# Altium PCB SOLAR CHARGER.PcbDoc
Units mm, origin at the board's own origin, x right, y up, seen from the top; angles counter-clockwise.
Board outline 37 x 32.33 mm, 2 copper layers (Top Layer, Bottom Layer); 38 components, 24 nets, 107 pads, 107 vias.
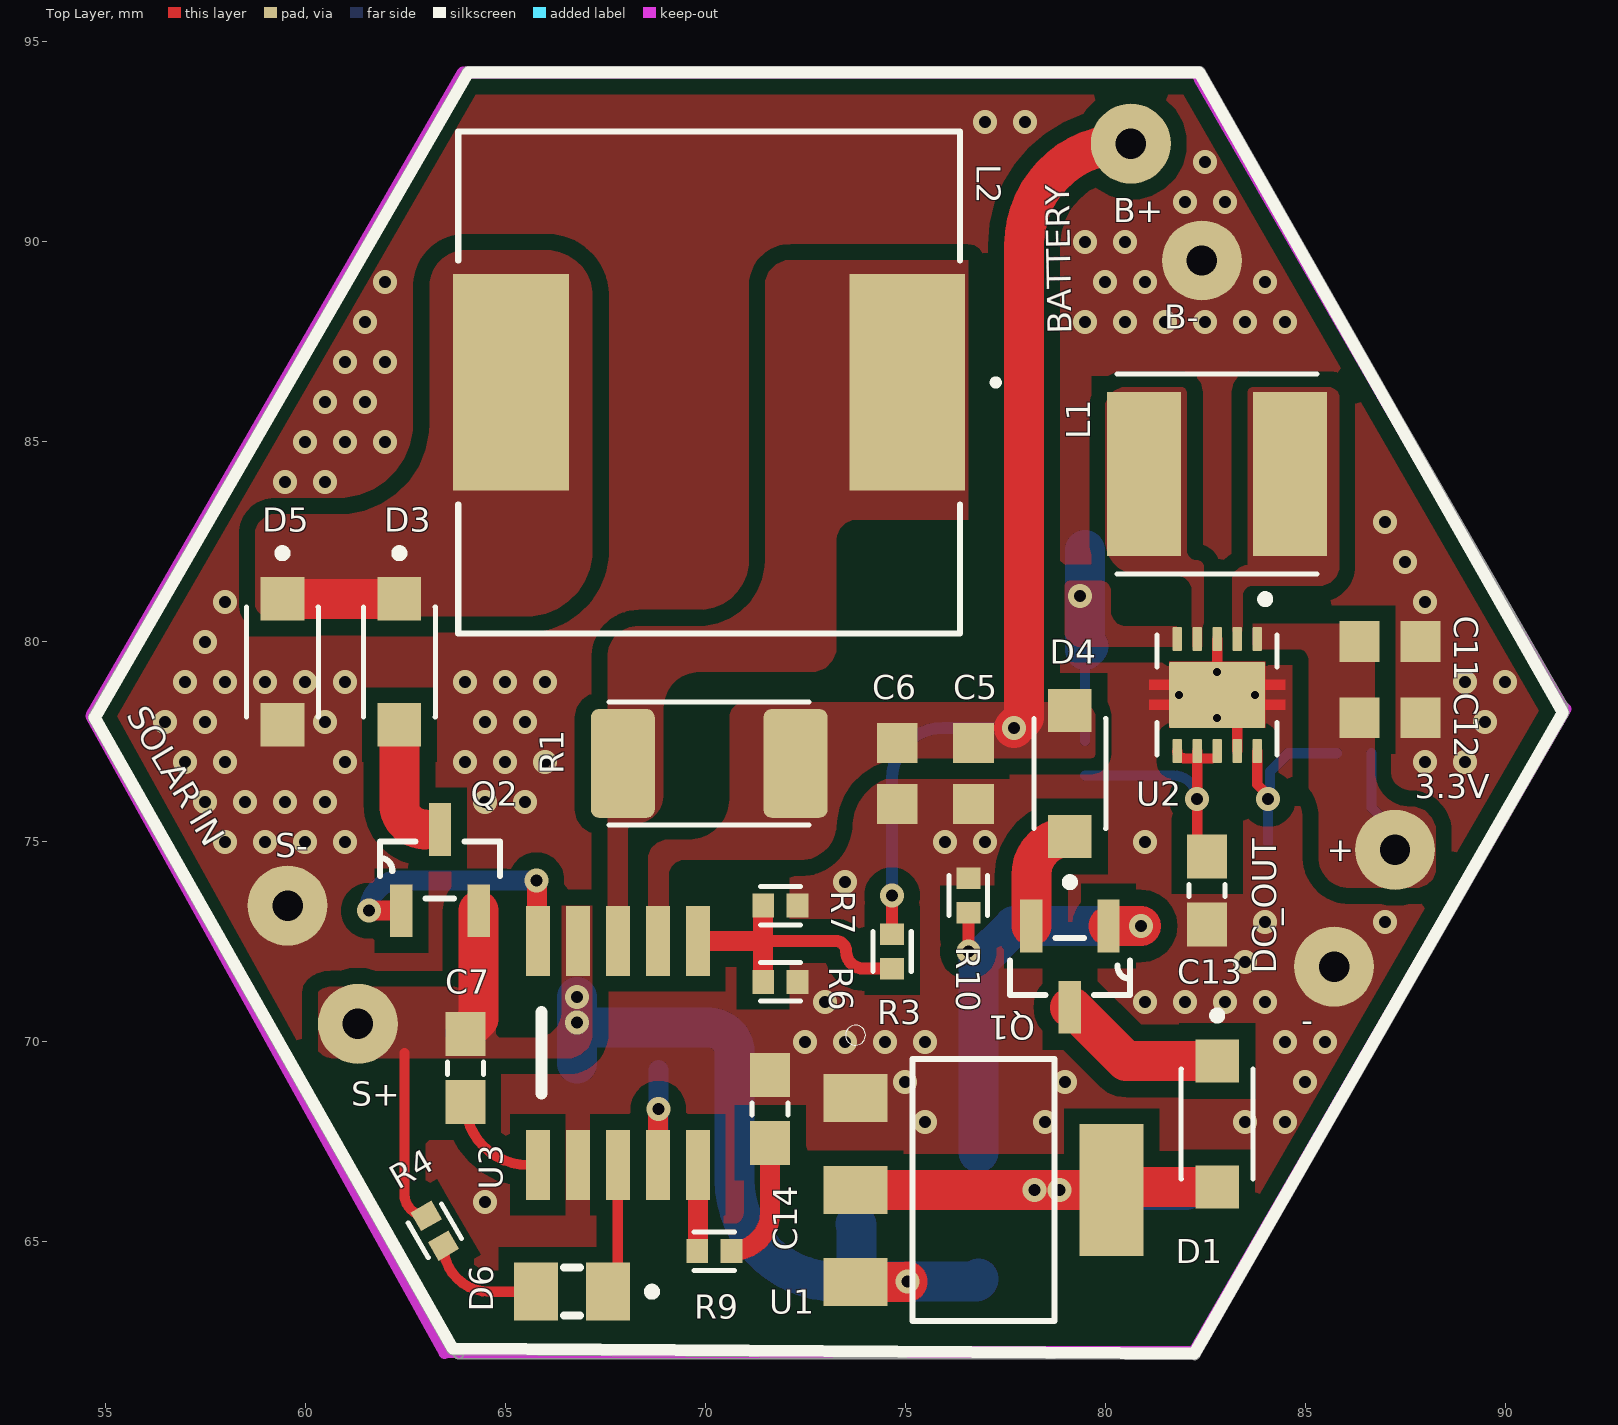
[diagram p0: Top Layer view]
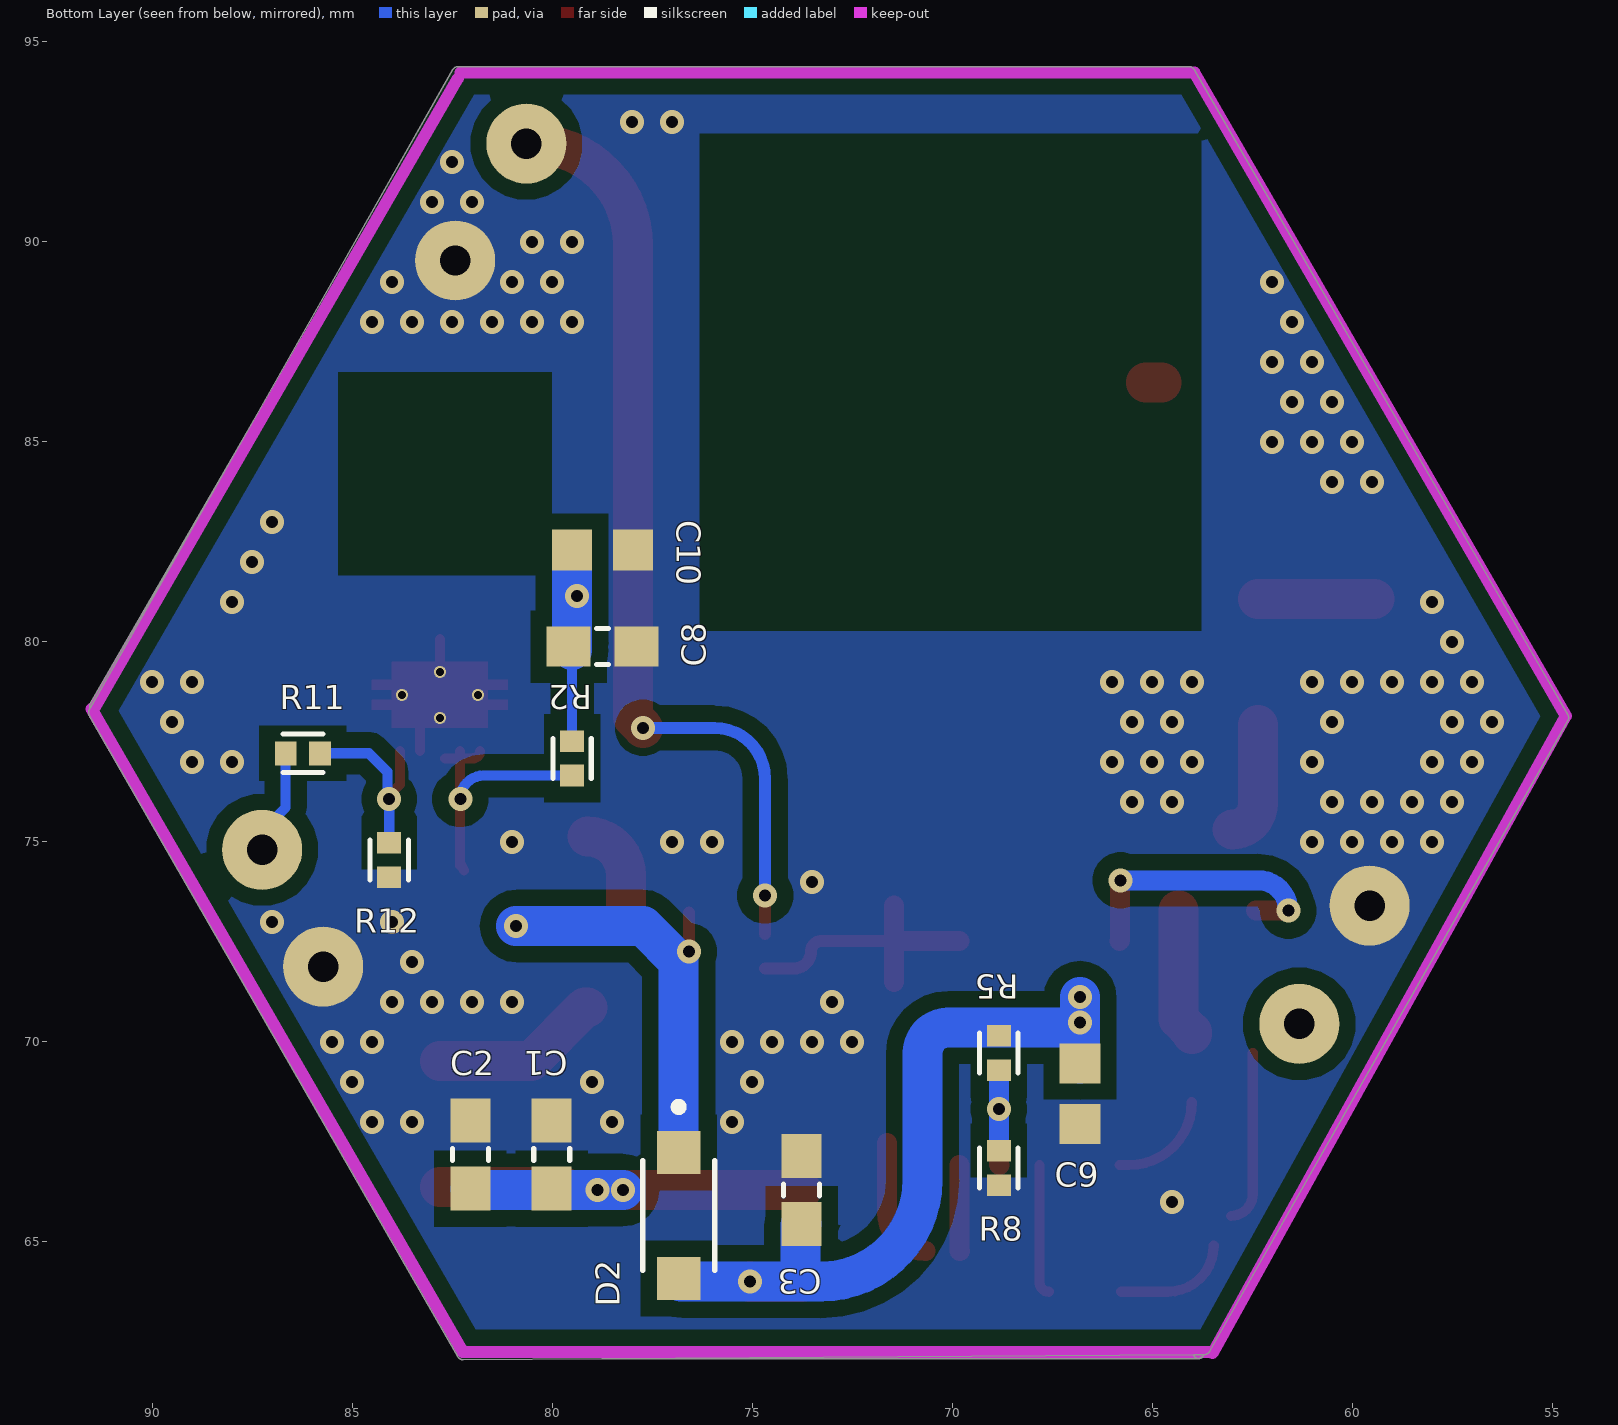
[diagram p1: Bottom Layer view, seen from below]
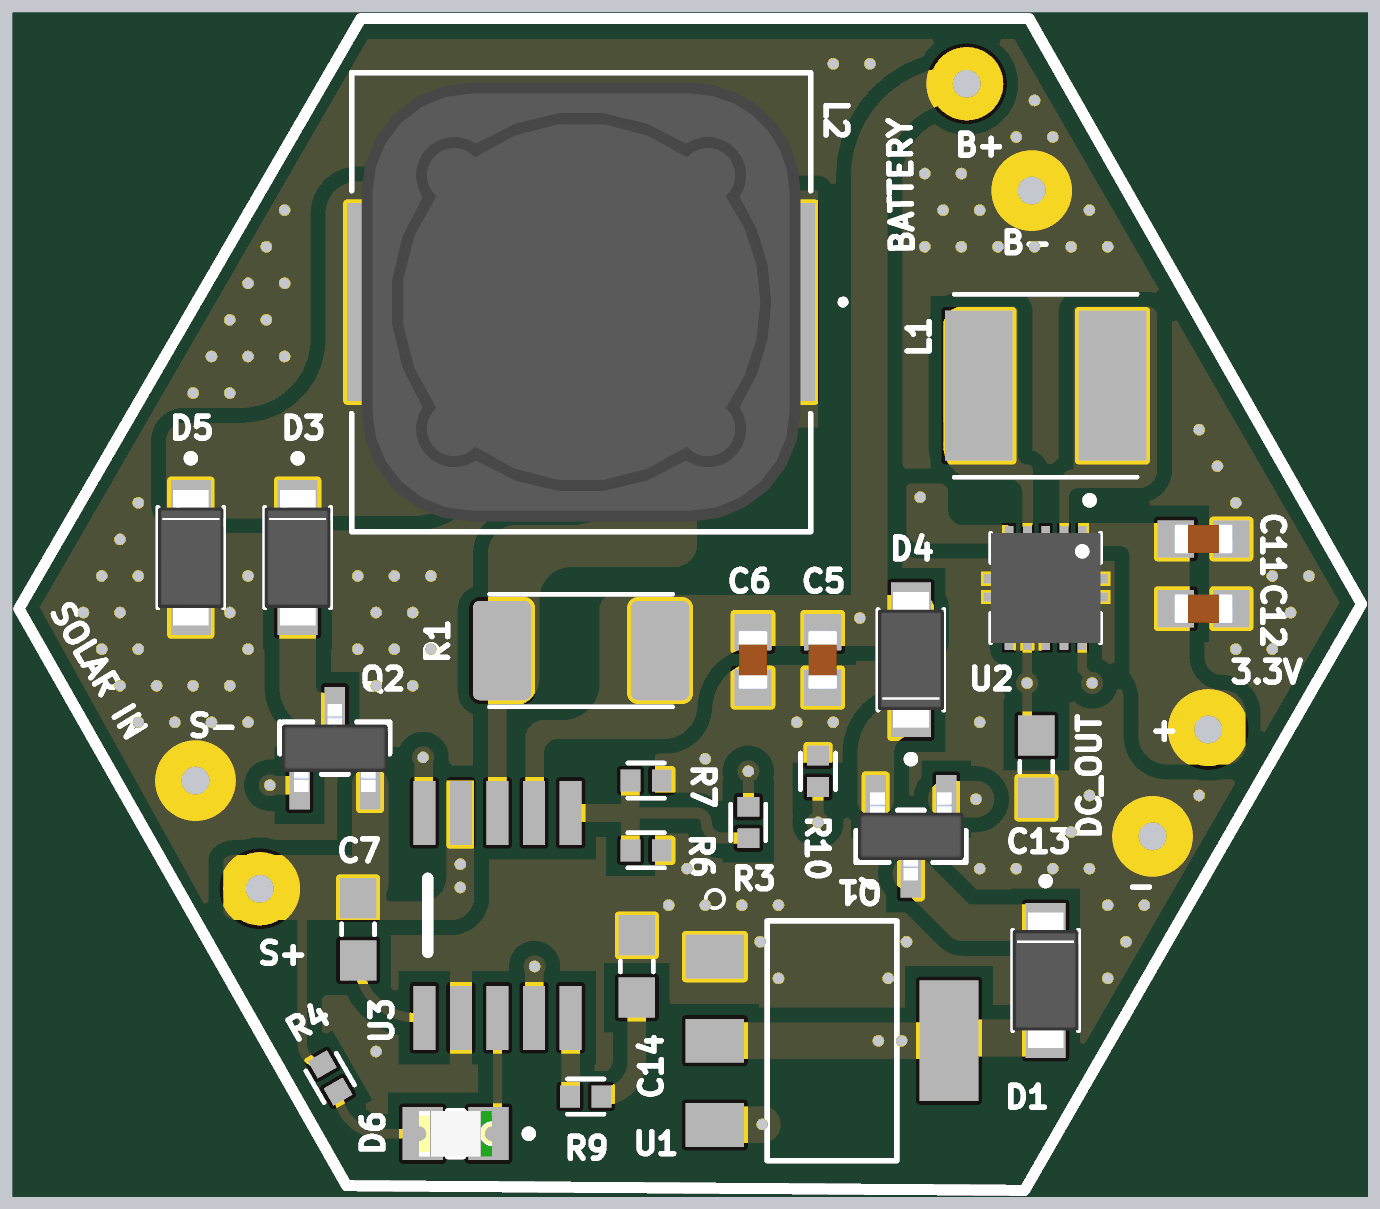
[diagram p2: 3D render of the assembled board from above, using the file's embedded part models]

## Layer stack, top to bottom
Top Solder: solder mask 0.0102, Solder Resist, Dk 3.5
Top Layer: signal copper 0.0356
Dielectric 1: dielectric 0.32, FR-4, Dk 4.8
Bottom Layer: signal copper 0.0356
Bottom Solder: solder mask 0.0102, Solder Resist, Dk 3.5

## Board outline
57.762,72.475 54.662,77.932 54.606,78.031 cw(c54.737,78.105) 54.591,78.143 cw(c54.736,78.105) 54.595,78.155 cw(c54.737,78.105) 54.607,78.181 55.465,79.661 63.889,94.201 63.951,94.309 cw(c64.082,94.234) 64.082,94.384 82.351,94.384 cw(c82.351,94.234) 82.482,94.308 87.377,85.69 91.551,78.342 ccw(c91.438,78.401) 91.565,78.401 ccw(c91.438,78.401) 91.548,78.465 87.377,85.69 91.551,78.342 91.571,78.306 ccw(c91.501,78.267) 91.571,78.306 cw(c91.44,78.232) 91.59,78.232 cw(c91.44,78.232) 91.57,78.157 82.358,62.13 cw(c82.228,62.205) 82.227,62.055 78.757,62.079 63.963,62.181 cw(c63.838,62.206) 63.838,62.079 78.757,62.079 63.963,62.181 63.713,62.182 ccw(c63.838,62.206) 63.727,62.143 ccw(c63.838,62.206) 63.838,62.079 63.727,62.143 63.704,62.182 63.695,62.182 cw(c63.696,62.333) 63.565,62.259

## Design rules (kind name [scope] priority, off if disabled: settings)
Clearance [All] p1: gap=0.2 ignorepadtopadclearanceinfootprint=FALSE
PolygonConnect PolygonConnect_2 [All vs IsNamedPolygon('NONET_L-01_P-001')] p1: connectstyle=Direct reliefconductorwidth=0.254 reliefentries=4 polygonreliefangle="90 Angle" airgapwidth=0.254
PolygonConnect PolygonConnect_1 [All vs IsNamedPolygon('NONET_L-01_P-001')] p2: connectstyle=Direct reliefconductorwidth=0.254 reliefentries=4 polygonreliefangle="90 Angle" airgapwidth=0.254
PolygonConnect [All] p3: connectstyle=Relief reliefconductorwidth=0.254 reliefentries=4 polygonreliefangle="90 Angle" airgapwidth=0.254
RoomDefinition "SOLAR CHARGER" [InComponentClass('SOLAR CHARGER')] p1 off: confinementstyle=ConfineIn formatcopy=TRUE lockcomponents=FALSE outline 53.34,60.833 93.345,60.833 93.345,96.393 53.34,96.393
RoutingVias [All] p1: holewidth=0.711 width=1.27 viastyle="Through Hole" minholewidth=0.711 minwidth=1.27 maxholewidth=0.711 maxwidth=1.27
SolderMaskExpansion [All] p1: expansion=0.102 istentingtop=FALSE
Width [All] p1: maxlimit=1 minlimit=0.254 preferedwidth=0.254
30 further rules are at their usual default settings.

## Components (designator, comment, footprint, x,y, rotation, side; value= is the part's Value field where it differs from the comment)
C1 "CC0603KRX5R5BB106" CAPC1608X90 80.01,67.183 r90 bottom value=0.1uF/50V
C2 "CC0603KRX5R5BB106" CAPC1608X90 82.042,67.183 r90 bottom value=0.1uF/50V
C3 "CC0603KRX5R5BB106" CAPC1608X90 73.762,66.294 r90 bottom value=0.1uF/50V
C5 "GRM188R61E106MA73J" CAPC1608X100N 76.708,76.708 r270 top value=10uF/25V
C6 "GRM188R61E106MA73J" CAPC1608X100N 74.803,76.708 r270 top value=10uF/25V
C7 "CC0603KRX5R5BB106" CAPC1608X90 64.008,69.342 r270 top value=0.1uF/50V
C8 "CC0603KRX5R5BB106" CAPC1608X90 78.74,79.883 r180 bottom value=0.1uF/50V
C9 "GRM188R61E106MA73J" CAPC1608X100N 66.802,68.707 r270 bottom value=10uF/25V
C10 "GRM188R61E106MA73J" CAPC1608X100N 78.74,82.296 r180 bottom value=10uF/25V
C11 "GRM188R61E106MA73J" CAPC1608X100N 87.122,80.01 r0 top value=10uF/25V
C12 "GRM188R61E106MA73J" CAPC1608X100N 87.122,78.105 r0 top value=10uF/25V
C13 "CC0603KRX5R5BB106" CAPC1608X90 82.55,73.787 r270 top value=0.1uF/50V
C14 "CC0603KRX5R5BB106" CAPC1608X90 71.628,68.326 r90 top value=220nF
D1 "SS310LW" SODFL3718X102N 82.804,67.945 r270 top
D2 "SS310LW" SODFL3718X102N 76.835,65.659 r270 bottom
D3 "SS310LW" SODFL3718X102N 62.357,79.502 r270 top
D4 "SS310LW" SODFL3718X102N 79.121,76.708 r90 top
D5 "SS310LW" SODFL3718X102N 59.436,79.502 r270 top
D6 "597-3305-607F" LEDC2012X70N 66.675,63.754 r180 top
L1 "LQH5BPN2R2NT0L" IND_LQH5BPN2R2NT0L 82.804,84.201 r0 top
L2 "CDRH127/LDNP-470MC" IND_CDRH127/LDNP-470MC_SUM 70.104,86.487 r180 top
Q1 "DMP3099L-13" SOT95P240X110-3N 79.121,71.882 r270 top
Q2 "DMP3099L-13" SOT95P240X110-3N 63.373,74.295 r90 top
R1 "2-2176251-7" RESC5025X70N 70.104,76.962 r0 top
R2 "RCWP040210K0FKS3" RESC1005X40 79.502,77.089 r90 bottom
R3 "RCWP040210K0FKS3" RESC1005X40 74.676,72.263 r90 top
R4 "RCWP040210K0FKS3" RESC1005X40 63.246,65.278 r120 top
R5 "RCWP040210K0FKS3" RESC1005X40 68.834,69.723 r90 bottom
R6 "RCWP040210K0FKS3" RESC1005X40 71.882,71.501 r180 top
R7 "RCWP040210K0FKS3" RESC1005X40 71.882,73.406 r180 top
R8 "RCWP040210K0FKS3" RESC1005X40 68.834,66.851 r90 bottom
R9 "RCWP040210K0FKS3" RESC1005X40 70.231,64.77 r180 top value=120R
R10 "RCWP040210K0FKS3" RESC1005X40 76.581,73.66 r270 top
R11 "RCWP040210K0FKS3" RESC1005X40 86.233,77.216 r180 bottom
R12 "RCWP040210K0FKS3" RESC1005X40 84.074,74.549 r270 bottom
U1 "AZ1117CH-3.3TRG1" DIODES_AZ1117CH-3.3TRG1_0 76.962,66.294 r270 top
U2 "TPS63001DRCRG4" VREG_V62/16624-01YE 82.804,78.673 r270 top
U3 "CN3795" SSOP10 67.818,69.723 r0 top

## Footprints (in the part's own frame and the unit in brackets; to place one, negate y for a bottom-side part, rotate by r counter-clockwise, add the part's x,y. Pads: shape width x height; smd on the part's side, far side on the other; paste and mask are expansions set on the pad)
CAPC1608X90 [mm]
  rect 1.1x1 smd: 1(-0.85,0) 2(0.85,0)
  silkscreen extent -0.15,-0.45 0.15,0.45
CAPC1608X100N [mm]
  rect 1x1.02 smd: 1(-0.759,0) 2(0.759,0)
  body extent -0.8,-0.4 0.8,0.4, height 1
DIODES_AZ1117CH-3.3TRG1_0 [mm]
  rect 1.2x1.6 smd: 1(-2.3,-3.2) 2(0,-3.2) 3(2.3,-3.2)
  rect 3.3x1.6 smd: 4(0,3.2)
  silkscreen extent -4.12,-3.45 3.27,1.78
IND_CDRH127/LDNP-470MC_SUM [mil]
  rect 114x213 smd: 1(-195,0) 2(195,0)
  silkscreen extent -285,-247 247,247, body extent -236,-236 236,236, height 315
IND_LQH5BPN2R2NT0L [mm]
  rect 1.85x4.1 smd: 1(-1.825,0) 2(1.825,0)
  silkscreen extent -2.5,-2.5 2.5,2.5
LEDC2012X70N [mm]
  rect 1.1x1.45 smd: A(0.9,0) C(-0.9,0)
  silkscreen extent -2.1,-0.6 0.2,0.6, body extent -1,-0.63 1,0.63, height 0.7
RESC1005X40 [mm]
  rect 0.54x0.6 smd: 1(-0.43,0) 2(0.43,0)
  silkscreen extent -0.5,-0.48 0.5,0.48
RESC5025X70N [mm]
  rrect25% 1.6x2.72 smd: 1(-2.16,0) 2(2.16,0)
  silkscreen extent -2.5,-1.54 2.5,1.54
SODFL3718X102N [mm]
  rect 1.08x1.09 smd: A(1.575,0) C(-1.575,0)
  silkscreen extent -2.81,-0.9 1.38,0.9, body extent -1.85,-0.9 1.85,0.9, height 1.02
SOT95P240X110-3N [mil]
  rect 52x22 smd: 1(-40,38) 2(-40,-38) 3(40,0)
  silkscreen extent -28,-59 28,59, body extent -47,-57 47,57, height 47
SSOP10 [mm]
  rect 0.6x1.75 smd: 1(-2,-2.8) 2(-1,-2.8) 3(0,-2.8) 4(1,-2.8) 5(2,-2.8) 6(2,2.8) 7(1,2.8) 8(0,2.8) 9(-1,2.8) 10(-2,2.8)
  silkscreen extent -1.91,-1.02 -1.91,1.02
VREG_V62/16624-01YE [mm]
  rrect25% 0.6x0.24 smd mask+0: 1(-1.4,1) 2(-1.4,0.5) 3(-1.4,0) 4(-1.4,-0.5) 5(-1.4,-1) 6(1.4,-1) 7(1.4,-0.5) 8(1.4,0) 9(1.4,0.5) 10(1.4,1)
  rrect5% 1.65x2.4 smd paste-2 mask+0: 11(0,0)
  round 0.3 hole 0.2 mask+0: 12(0,-0.95) 13(-0.575,0) 14(0.575,0) 15(0,0.95)
  Top Layer region: 0.375,1.2 0.825,1.2 0.825,-1.2 0.375,-1.2 0.375,-1.7 0.125,-1.7 0.125,-1.2 -0.125,-1.2 -0.125,-1.7 -0.375,-1.7 -0.375,-1.2 -0.825,-1.2 -0.825,1.2 -0.375,1.2 -0.375,1.7 -0.125,1.7 -0.125,1.2 0.125,1.2 0.125,1.7 0.375,1.7
  silkscreen extent -2.49,-1.5 1.5,1.5, body extent -1.5,-1.5 1.5,1.5, height 1

## Part data
C1 C2 C3 C7 C8 C13 C14: "10ÂµF Â±10% 6.3V Ceramic Capacitor X5R 0603 _1608 Metric_", Package="0603 Yageo", Digi-Key_Part_Number=311-1781-1-ND, Digi-Key_Purchase_URL=https://www.digikey.ca/product-detail/en/yageo/CC0603KRX5R5BB106/311-1781-1-ND/5195683?utm_source=snapeda&utm_medium=aggregator&utm_campaign=symbol, MF=Yageo, MP=CC0603KRX5R5BB106, SnapEDA_Link=https://www.snapeda.com/parts/CC0603KRX5R5BB106/Yageo/view-part/566409/?ref=snap
C5 C6 C9 C10 C11 C12: "0603 10 uF 25 V Â±20% Tolerance X5R Multilayer Ceramic Capacitor", Package="1608 Murata", Availability="In Stock", Check_prices=https://www.snapeda.com/parts/GRM188R61E106MA73J/Murata%20Electronics%20North%20America/view-part/1836504/?ref=eda, MF="Murata Electronics", MP=GRM188R61E106MA73J, Price=None, SnapEDA_Link=https://www.snapeda.com/parts/GRM188R61E106MA73J/Murata%20Electronics%20North%20America/view-part/1836504/?ref=snap
D1 D2 D3 D4 D5: "3A, 100V, Schottky Rectifier", Package="SOD-123W-2 Taiwan Semiconductor", Check_prices=https://www.snapeda.com/parts/SS310LW/Taiwan+Semiconductor/view-part/?ref=eda, MF="Taiwan Semiconductor", MP=SS310LW, Purchase-URL=https://pricing.snapeda.com/search/part/SS310LW/?ref=eda, SnapEDA_Link=https://www.snapeda.com/parts/SS310LW/Taiwan+Semiconductor/view-part/?ref=snap
D6: "LED Uni-Color Green 4-Pin Chip 0805 T/R", Package=None, Availability=Unavailable, MP=597-3305-607F, Price=None
L1: "Inductor Power Chip Shielded Wirewound 1.2uH 30% 100KHz Ferrite 3.1A 0.0228Ohm DCR 2020 T/R", Package=None, Availability=Unavailable, MP=LQH5BPN2R2NT0L, Price=None
L2: "47 ÂµH Shielded - Inductor 3.25 A 78mOhm Max Nonstandard", Package="Nonstandard Sumida", Availability="In Stock", Check_prices=https://www.snapeda.com/parts/CDRH127/LDNP-470MC/Sumida+America+Components+Inc./view-part/?ref=eda, MF="Sumida America", MP=CDRH127/LDNP-470MC, Price=None, Purchase-URL=https://pricing.snapeda.com/search/part/CDRH127/LDNP-470MC/?ref=eda, SnapEDA_Link=https://www.snapeda.com/parts/CDRH127/LDNP-470MC/Sumida+America+Components+Inc./view-part/?ref=snap
Q1 Q2: "P-Channel 30 V 3.8A (Ta) 1.08W (Ta) Surface Mount SOT-23-3", Package="SOT-23-3 Diodes Inc.", Check_prices=https://www.snapeda.com/parts/DMP3099L-13/Diodes+Inc./view-part/?ref=eda, MF="Diodes Inc.", MP=DMP3099L-13, SnapEDA_Link=https://www.snapeda.com/parts/DMP3099L-13/Diodes+Inc./view-part/?ref=snap
R1: "CRGS2010J150R - Each", Package=None, Availability=Unavailable, MP=2-2176251-7, Price=None
R2 R3 R4 R5 R6 R7 R8 R9 R10 R11 R12: "Res Thick Film 0402 10K Ohm 1% 1/20W Â±100ppm/Â°C Molded SMD SMD T/R", Package=None, Availability=Unavailable, MP=RCWP040210K0FKS3, Price=None
U1: "Linear Voltage Regulator IC Positive Fixed 1 Output 1A SOT-223-3", Package="SOT-223 Diodes Inc.", Availability="In Stock", Check_prices=https://www.snapeda.com/parts/AZ1117CH-3.3TRG1/Diodes+Inc./view-part/?ref=eda, MF="Diodes Inc.", MP=AZ1117CH-3.3TRG1, Price=None, Purchase-URL=https://pricing.snapeda.com/search/part/AZ1117CH-3.3TRG1/?ref=eda, SnapEDA_Link=https://www.snapeda.com/parts/AZ1117CH-3.3TRG1/Diodes+Inc./view-part/?ref=snap
U2: "96% Buck-Boost Converter with 1.7A Current Switches, 3.3V fixed Output voltage in 3x3 QFN 10-VSON -40 to 85", Package="VSON-10 Texas Instruments", Availability="In Stock", Check_prices=https://www.snapeda.com/parts/TPS63001DRCRG4/Texas+Instruments/view-part/?ref=eda, MF="Texas Instruments", MP=TPS63001DRCRG4, Price=None, Purchase-URL=https://pricing.snapeda.com/search/part/TPS63001DRCRG4/?ref=eda, SnapEDA_Link=https://www.snapeda.com/parts/TPS63001DRCRG4/Texas+Instruments/view-part/?ref=snap
U3: "4A, Multi-Chemistry Battery ChargerWith Photovoltaic Cell MPPT Function", Package=Package, Availability="Not in stock", Check_prices=https://www.snapeda.com/parts/CN3795/Consonance/view-part/?ref=eda, MF=Consonance, MP=CN3795, Price=None, SnapEDA_Link=https://www.snapeda.com/parts/CN3795/Consonance/view-part/?ref=snap

## Free pads (board coordinates)
  round 2 hole 0.762: 2(59.563,73.406) 3(61.321,70.45) 3(80.645,92.456) 3(82.423,89.535) 3(85.725,71.882) 3(87.249,74.803)

## Via types
v1: diameter 0.6, hole 0.3, Top Layer to Bottom Layer, tented both sides, 107 vias

## Nets (pads, with @x,y where several pads share a name; then routed paths per layer and width w, separated by ;. In a path a pad name is that pad's centre, name@x,y a point inside that pad or via, vN(x,y) a via of type N, cw(c..) or ccw(c..) an arc to the next point about the centre after c; other vN are vias at no path point)
3.3V: C11.1 C12.1 pad.3@87.249,74.803 R11.1 U2.1 | length 2.7
  Bottom Layer w0.254: R11.1 86.663,75.861 87.249,75.275 pad.3@87.249,74.803
4.2V: C5.1 C6.1 D4.A pad.3@80.645,92.456 R1.2 R3.2 U3.7 | length 23.9
  Top Layer w0.3: R3.2 v1(74.676,73.66)
  Top Layer w1: v1(77.724,77.851) 77.978,78.105 77.978,89.916 cw(c80.518,89.916) 80.378,92.452 cw(c80.518,89.916) 80.518,92.456 pad.3@80.645,92.456
  Bottom Layer w0.3: v1(74.676,73.66) 74.676,76.581 cw(c75.946,76.581) 75.946,77.851 v1(77.724,77.851)
+5: C1.1 C2.1 D1.A U1.2 U1.4 | length 12.9
  Top Layer w1: U1.2 v1(78.232,66.294) v1(78.867,66.294) 79.629,66.294 79.705,66.37 D1.A
  Bottom Layer w1: v1(78.232,66.294) v1(78.867,66.294) 82.003,66.294 ccw(c82.003,66.333) C2.1
+12: C3.1 C7.1 C9.1 D2.A pad.3@61.321,70.45 Q2.2 R4.2 R5.2 U1.3 U3.9 | length 27.1
  Top Layer w0.254: 62.484,69.723 62.484,66.197 ccw(c63.031,66.197) R4.2
  Top Layer w1: C7.1 64.008,70.242 64.338,70.572 Q2.2 ; U1.3 75.057,63.994 v1(75.057,64.008)
  Bottom Layer w1: C9.1 v1@66.802,70.358 ; v1(66.802,71.12) v1@66.802,70.358 ; C3.1 cw(c73.762,65.419) 73.787,65.419 73.787,64.008 ; D2.A cw(c76.759,64.084) 76.759,64.008 v1(75.057,64.008) 73.787,64.008 ; v1@66.802,70.358 70.104,70.358 cw(c70.104,69.723) 70.739,69.723 70.739,66.548 ccw(c73.279,66.548) 73.279,64.008 73.787,64.008
  other v1: 66.802,70.485
GND: C1.2 C2.2 C3.2 C5.2 C6.2 C8.2 C9.2 C10.2 C11.2 C12.2 C13.2 C14.2 D5.A pad.2 pad.3@82.423,89.535 pad.3@85.725,71.882 R6.1 R7.1 R8.1 R10.1 R12.2 U1.1 U2.3 U2.9 U2.11 U2.12 U2.13 U2.14 U2.15 U3.2 | length 2.4
  Top Layer w0.254: U2.11 83.304,78.173 U2.9 ; U2.13 U2.3
  other v1: 64.5,66 75.5,68 78.5,68 83.5,68 84.5,68 75,69 79,69 85,69 72.5,70 73.5,70 74.5,70 75.5,70 84.5,70 85.5,70 73,71 81,71 82,71 83,71 84,71 83.5,72 84,73 87,73 73.5,74 58,75 59,75 60,75 61,75 76,75 77,75 81,75 57.5,76 58.5,76 59.5,76 60.5,76 64.5,76 65.5,76 57,77 58,77 61,77 64,77 65,77 66,77 88,77 89,77 56.5,78 57.5,78 60.5,78 64.5,78 65.5,78 89.5,78 57,79 58,79 59,79 60,79 61,79 64,79 65,79 66,79 89,79 90,79 57.5,80 58,81 88,81 87.5,82 87,83 59.5,84 60.5,84 60,85 61,85 62,85 60.5,86 61.5,86 61,87 62,87 61.5,88 79.5,88 80.5,88 81.5,88 82.5,88 83.5,88 84.5,88 62,89 80,89 81,89 84,89 79.5,90 80.5,90 82,91 83,91 82.5,92 77,93 78,93
NetC7_2: C7.2 U3.1 | length 2.7
  Top Layer w0.254: C7.2 ccw(c65.577,68.492) 65.577,66.923 U3.1
NetC8_1: C8.1 C10.1 R2.2 U2.5 | length 4.9
  Bottom Layer w0.254: R2.2 C8.1@79.502,79.795
  Bottom Layer w1: C10.1 79.499,79.974 ccw(c79.59,79.974) C8.1 ccw(c79.59,79.795) C8.1@79.502,79.795
  other v1: 79.375,81.153
NetC13_1: C13.1 R2.1 U2.6 U2.7 U2.8 | length 7.2
  Top Layer w0.254: U2.6 ccw(c81.988,77.273) 81.988,77.089 U2.7@82.304,77.089 ; C13.1@82.2,74.287 C13.1@82.304,74.502 ; C13.1@82.304,74.414 82.304,76.073 U2.7@82.304,77.089 ; U2.7 U2.7@82.304,77.089 ; 82.677,77.089 U2.7@82.304,77.089
  Bottom Layer w0.254: R2.1 81.71,76.659 cw(c81.71,76.073) v1(82.296,76.073)
NetC14_1: C14.1 R9.1 | length 3.3
  Top Layer w0.5: R9.1 ccw(c70.661,65.737) 71.628,65.737 C14.1
NetD1_C: D1.C Q1.3 | length 4.2
  Top Layer w1: Q1.3 79.181,70.866 80.527,69.52 D1.C
NetD2_C: D2.C Q1.1 R10.2 | length 11.4
  Top Layer w0.3: v1(76.581,72.263) R10.2
  Top Layer w1: Q1.1 v1(80.899,72.898)
  Bottom Layer w0.3: v1(76.581,72.263) cw(c76.581,72.009) 76.835,72.009
  Bottom Layer w1: D2.C 76.835,72.009 77.724,72.898 v1(80.899,72.898)
NetD3_A: D3.A Q2.3 | length 3
  Top Layer w1: D3.A 62.357,75.946 ccw(c62.992,75.946) 62.992,75.311
NetD3_C: D3.C D5.C L2.2 | length 3.3
  Top Layer w1: D5.C D3.C ; L2.2@64.77,86.487 L2.2
NetD4_C: D4.C Q1.2 | length 2.8
  Top Layer w1: Q1.2 78.156,74.168 cw(c79.121,74.168) D4.C
NetD6_A: D6.A R4.1 | length 3
  Top Layer w0.254: R4.1 ccw(c64.613,64.906) 64.613,63.754 D6.A
NetD6_C: D6.C U3.3 | length 3.3
  Top Layer w0.254: D6.C ccw(c67.575,63.997) 67.818,63.997 U3.3
NetL1_1: L1.1 U2.4
NetL1_2: L1.2 U2.2
NetL2_1: L2.1 R1.1 U3.8
NetQ2_1: Q2.1 U3.10 | length 7
  Top Layer w0.5: v1(61.595,73.279) Q2.1 ; v1(65.786,74.041) 65.802,74.025 65.802,72.539 U3.10
  Bottom Layer w0.5: v1(61.595,73.279) cw(c62.357,73.279) 62.357,74.041 v1(65.786,74.041)
NetR3_1: R3.1 R6.2 R7.2 U3.6 | length 7.1
  Top Layer w0.3: 71.383,72.523 71.452,72.523 73.267,72.523 cw(c73.267,72.263) 73.527,72.263 ccw(c73.957,72.263) 73.957,71.833 R3.1 ; 71.452,72.453 ccw(c71.897,72.453) 71.455,72.405
  Top Layer w0.5: U3.6 71.383,72.523 ; R6.2 71.452,72.453 ; 71.452,72.523 R7.2
NetR5_1: R5.1 R8.2 U3.4 | length 3.4
  Top Layer w0.5: U3.4 68.826,66.931 68.826,68.318 v1(68.834,68.326)
  Bottom Layer w0.5: R8.2 v1(68.834,68.326) R5.1
NetR9_2: R9.2 U3.5 | length 2.2
  Top Layer w0.5: R9.2 69.818,64.77 U3.5
NetR11_2: R11.2 R12.1 U2.10 | length 5
  Top Layer w0.254: U2.10 83.804,76.437 84.074,76.167 v1(84.074,76.073)
  Bottom Layer w0.254: R12.1 v1(84.074,76.073) 84.12,76.119 84.12,76.754 84.582,77.216 R11.2

## Polygon pours and split planes (outlines as drawn)
GND on Top Layer "NONET_L-01_P-001" (solid, remove dead copper, pour order 22): 55.332,61.341 53.975,95.045 91.59,95.045 91.59,61.341
3.3V on Top Layer "NONET_L-01_P-001" (solid, remove dead copper, pour order 18): 83.693,80.455 86.487,80.455 cw(c86.487,80.201) 86.741,80.201 86.741,76.772 ccw(c87.63,76.771) 87.63,75.883 cw(c87.63,75.248) 88.265,75.248 88.265,74.359 cw(c87.757,74.359) 87.757,73.851 86.106,73.851 cw(c86.106,74.612) 85.344,74.613 85.344,75.629 ccw(c84.201,75.629) 85.09,76.347 85.09,77.788 85.09,79.566 ccw(c84.836,79.566) 84.836,79.82 83.82,79.82 cw(c83.82,79.947) 83.693,79.947
NetL1_2 on Top Layer "NONET_L-01_P-001" (solid, remove dead copper, pour order 15): 83.185,80.264 83.185,81.534 cw(c83.566,81.534) 83.566,81.915 83.566,86.233 cw(c83.693,86.233) 83.693,86.36 85.598,86.36 cw(c85.598,86.106) 85.852,86.106 85.852,81.915 cw(c85.344,81.915) 85.344,81.407 83.693,81.407 ccw(c83.693,81.153) 83.439,81.153 83.439,80.264
NetL1_1 on Top Layer "NONET_L-01_P-001" (solid, remove dead copper, pour order 14): 82.169,79.883 82.169,81.28 ccw(c81.788,81.28) 81.788,81.661 80.899,81.661 cw(c80.899,82.55) 80.01,82.55 80.01,85.852 cw(c80.518,85.852) 80.518,86.36 81.915,86.36 cw(c81.915,86.233) 82.042,86.233 82.042,82.296 ccw(c82.296,82.296) 82.296,82.042 cw(c82.296,81.875) 82.463,81.875 82.463,79.923 cw(c82.423,79.923) 82.423,79.883
4.2V on Top Layer "NONET_L-01_P-001" (solid, remove dead copper, pour order 9): 79.375,78.486 cw(c79.375,78.105) 79.756,78.105 79.756,77.216 cw(c79.629,77.216) 79.629,77.089 75.018,77.089 ccw(c75.018,75.35) 73.279,75.35 cw(c73.113,75.35) 73.113,75.184 71.12,75.184 cw(c71.12,75.311) 70.993,75.311 70.993,78.105 cw(c71.374,78.105) 71.374,78.486
NetC8_1 on Top Layer "NONET_L-01_P-001" (solid, remove dead copper, pour order 12): 81.788,80.391 80.518,80.391 cw(c80.518,80.772) 80.137,80.772 80.137,81.28 ccw(c79.883,81.28) 79.883,81.534 79.121,81.534 ccw(c79.121,81.407) 78.994,81.407 78.994,80.264 ccw(c79.375,80.264) 79.375,79.883 81.788,79.883
4.2V on Top Layer "NONET_L-01_P-001" (solid, remove dead copper, pour order 8): 68.58,74.549 cw(c69.088,74.549) 69.088,75.057 69.596,75.057 ccw(c69.596,76.073) 70.612,76.073 70.612,78.105 cw(c70.993,78.105) 70.993,78.486 73.279,78.486 73.279,75.438 cw(c72.39,75.438) 72.39,74.549 69.469,74.549 ccw(c69.469,74.168) 69.088,74.168 69.088,72.898 68.58,72.898
NetL2_1 on Top Layer "NONET_L-01_P-001" (solid, remove dead copper, pour order 5): 67.564,79.629 cw(c68.326,79.629) 68.326,80.391 69.85,80.391 ccw(c69.85,82.042) 71.501,82.042 71.501,88.9 cw(c72.136,88.9) 72.136,89.535 76.581,89.535 76.581,83.058 73.787,83.058 ccw(c73.787,82.55) 73.279,82.55 73.279,79.883 cw(c72.644,79.883) 72.644,79.248 69.85,79.248 ccw(c69.85,78.359) 68.961,78.359 68.961,76.2 cw(c68.199,76.2) 68.199,75.438 ccw(c68.199,75.311) 68.072,75.311 68.072,71.755 67.564,71.755
NetD3_C on Top Layer "NONET_L-01_P-001" (solid, remove dead copper, pour order 1): 58.928,80.518 cw(c59.055,80.518) 59.055,80.645 65.532,80.645 ccw(c65.532,82.296) 67.183,82.296 67.183,88.646 ccw(c66.04,88.646) 66.04,89.789 64.008,89.789 ccw(c64.008,88.9) 63.119,88.9 63.119,85.471 cw(c60.833,85.471) 60.833,83.185 59.254,83.185 ccw(c59.254,82.69) 58.759,82.69 58.759,80.941 ccw(c59.055,80.941) 59.055,80.645
+12 on Top Layer "NONET_L-01_P-001" (solid, remove dead copper, pour order 0): 60.325,71.247 cw(c60.632,70.94) 60.632,71.374 63.627,71.374 cw(c63.627,70.231) 64.77,70.231 ccw(c64.897,70.231) 64.897,70.104 65.786,70.104 ccw(c65.786,70.739) 66.421,70.739 66.421,73.406 67.183,73.406 67.183,70.231 cw(c66.548,70.231) 66.548,69.596 60.706,69.596 cw(c60.706,70.104) 60.325,69.768
GND on Bottom Layer "NONET_L-01_P-001" (solid, remove dead copper, pour order 24): 54.229,95.25 92.202,95.25 92.202,61.722 54.229,61.722

## Keep-outs
Keep-Out Layer:
  lines w0.3: 63.488,62.223 54.659,78.151 63.944,94.234 82.296,94.234 ; 63.488,62.252 82.235,62.252 91.511,78.318 ; 82.359,94.087 91.44,78.359

## Other copper
Bottom Layer:
  pour cut-out: 80.01,86.741 85.344,86.741 85.344,81.661 80.01,81.661
  pour cut-out: 63.754,92.71 76.327,92.71 76.327,80.264 63.754,80.264

## Silkscreen, mask and mechanical layers (free items; w line width, h text height)
Top Overlay:
  lines w0.3: 54.737,78.105 64.082,94.234 82.351,94.234 91.44,78.232 82.228,62.205 63.696,62.333 54.737,78.105
  text "B+" at 80.21,90.497 h0.6
  text "B-" at 81.48,87.83 h0.6
  text "BATTERY" at 79.172,87.699 h0.6 r91
  text "SOLAR IN" at 55.519,78.164 h0.6 r301
  text "3.3V" at 87.743,76.087 h0.6
  text "S-" at 59.255,74.622 h0.6
  text "+" at 85.544,74.522 h0.6
  text "DC_OUT" at 84.282,71.701 h0.6 r90
  text "-" at 84.909,70.258 h0.6
  text "S+" at 61.16,68.399 h0.6